# Allegro board P3.brd
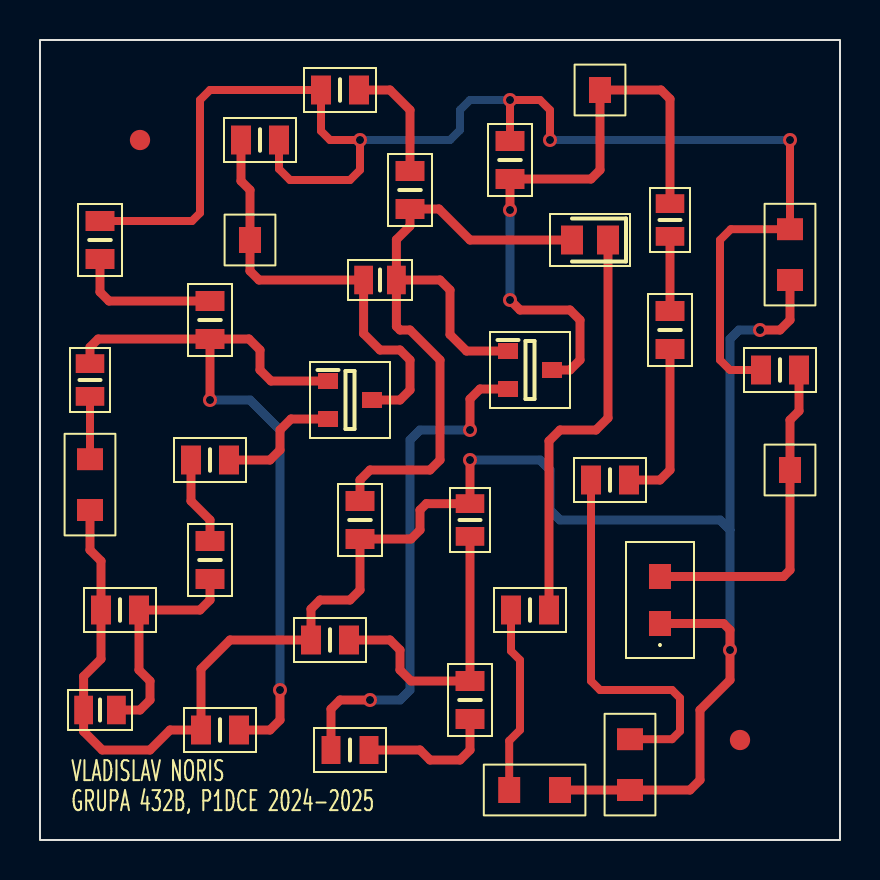
[diagram p0: board, top side]
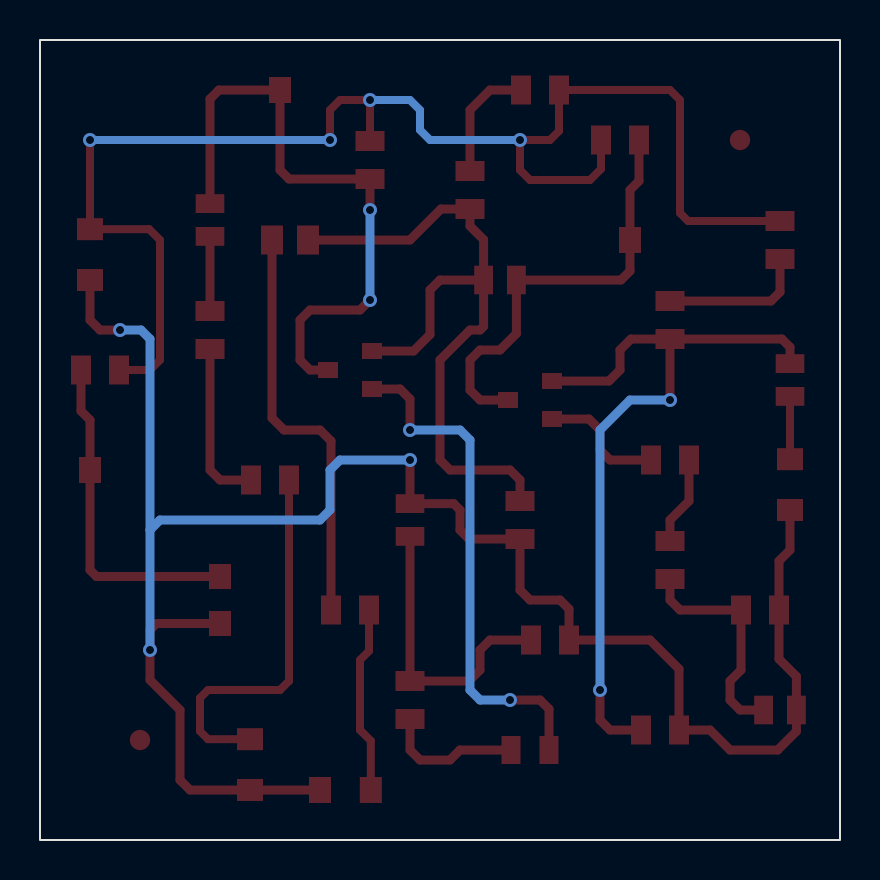
[diagram p1: board, bottom side, seen from below]

Outline 40 x 40 mm; copper layers: TOP, BOTTOM. Coordinates in mm from the lower left corner of the outline.
Outline path: rectangle 0,0 40,40

## Design rules (mm)
nets with their own width: min track width 0.4; nets VCONTROL VDC VIN VOUT
nets with their own width: min track width 0.45; nets GND N35907 N35965 N35977 N36069 N36081 N36093 N36259 N36289 N36347 N36449 N36455 N36461 N36561 N36701 N40456 N40780

## Placement (name value [footprint] x y rotation side)
C1  4.7u  [CAPC2012X140N]  2.5 23 270 top
C3  4.7u  [CAPC2012X140N]  17 28 0 top
C5  4.7u  [CAPC2012X140N]  31.5 31 270 top
C6  4.7u  [CAPC2012X140N]  3 6.5 0 top
C7  4.7u  [CAPC2012X140N]  21.5 16 270 top
D1  D1N4148  [DIOC2012X95N]  27.5 30 180 top
D2  SMLS14BET  [OFSMD2012B]  31 12 90 top
J1  CON2  [JUMPER2]  2.5 16.5 90 top
J2  CON1  [JUMPER1]  10.5 30 0 top
J3  CON2  [JUMPER2]  26 2.5 180 top
J4  CON1  [JUMPER1]  28 37.5 0 top
J5  CON2  [JUMPER2]  29.5 2.5 90 top
J6  CON1  [JUMPER1]  37.5 18.5 0 top
J7  CON2  [JUMPER2]  37.5 28 90 top
NOREF  -  []  0 40 0 top
NOREF#2  -  [unnamed#2]  35 5 0 top
NOREF#3  -  [unnamed#2]  5 35 0 top
NOREF#4  -  []  40 0 90 top
Q1  BC846B  [SOT95P230X110-3N]  15.5 22 0 top
Q2  BC846B  [SOT95P230X110-3N]  24.5 23.5 0 top
R1  10k  [RESC2013X65N]  3 30 90 top
R2  47k  [RESC2013X65N]  8.5 26 90 top
R3  6.8k  [RESC2013X65N]  9 5.5 0 top
R4  2k  [RESC2013X65N]  11 35 0 top
R5  22  [RESC2013X65N]  8.5 19 0 top
R6  100  [RESC2013X65N]  8.5 14 90 top
R7  150  [RESC2013X65N]  4 11.5 0 top
R8  15k  [RESC2013X65N]  15 37.5 180 top
R9  15k  [RESC2013X65N]  18.5 32.5 90 top
R10  6.8k  [RESC2013X65N]  16 16 90 top
R11  150  [RESC2013X65N]  24.5 11.5 0 top
R12  2k  [RESC2013X65N]  23.5 34 90 top
R13  51  [RESC2012X60N]  15.5 4.5 180 top
R14  220  [RESC2013X65N]  21.5 7 270 top
R15  150  [RESC2013X65N]  14.5 10 0 top
R16  22  [RESC2013X65N]  31.5 25.5 90 top
R17  680  [RESC2013X65N]  28.5 18 0 top
R18  470  [RESC2013X65N]  37 23.5 180 top

## Library data of the parts
C1 C3 C5-C7 = C
D1 = 1N4148_2
D2 = SMLS14BET_2
J1 J3 J5 J7 = CON2: User Part Number: ***
J2 J4 J6 = CON1: User Part Number: ***
Q1 = BC846B_0
Q2 = BC846B_1
R1-R18 = R

## Footprints (pads in the part's own frame, mm; a bottom-side part is the same pattern mirrored in y, then rotated)
CAPC2012X140N
  rect 0.94x1.43 smd: 1(-0.82,0) 2(0.82,0)
DIOC2012X95N
  rect 1.1x1.45 smd: 1(-0.9,0) 2(0.9,0)
JUMPER1
  rect 1.1x1.3 smd: 1(0,0)
JUMPER2
  rect 1.1x1.3 smd: 1(0,0) 2(2.54,0)
OFSMD2012B
  rect 1.25x1.1 smd: 1(-1.175,0) 2(1.175,0)
RESC2012X60N
  rect 0.95x1.4 smd: 1(-0.95,0) 2(0.95,0)
RESC2013X65N
  rect 1x1.45 smd: 1(-0.95,0) 2(0.95,0)
SOT95P230X110-3N
  rect 1x0.8 smd: 1(-1.1,0.95) 2(-1.1,-0.95) 3(1.1,0)
unnamed#2
  round 1.016 smd: (0,0)

## Nets
GND: C6.1 C7.1 D2.1(C) J1.1 J3.1 J5.1 J7.1 R3.1 R7.1 R10.1 R15.1
VIN: C1.2 J1.2
VCONTROL: J3.2 R11.1
VDC: J7.2 R1.2 R4.2 R8.2 R12.2 R18.2
VOUT: J5.2 R17.1
N35907: R8.1 R9.2
N35965: C5.1 J4.1 Q2.3 R12.1
N35977: C3.1 J2.1 Q1.3 R4.1
N36069: C5.2 R16.2
N36081: D2.2 J6.1 R18.1
N36093: C3.2 D1.2 Q2.1 R9.1 R10.2
N36259: C1.1 Q1.1 R2.1 R3.2
N36289: Q2.2(E) R13.2
N36347: Q1.2(E) R5.2
N36449: R16.1 R17.2
N36455: R13.1 R14.2
N36461: D1.1(C) R11.2
N36561: C7.2 R14.1 R15.2
N36701: C6.2 R6.1 R7.2
N40456: R1.1 R2.2
N40780: R5.1 R6.2

## Via types
v1: diameter 0.7, hole 0.4, TOP to BOTTOM, 13 vias

## Routing (per net, layer and track width the routed paths; a pad name or vN(x,y) marks a point on that pad's centre or on a via; arc(x,y) is an arc through that point)
GND: length 98.9
  TOP w0.45: v1(21.5,19) C7.1 19.32,16.82 19,16.5 19,15.5 18.55,15.05 R10.1 16,12.5 15.5,12 14,12 13.55,11.55 R15.1 9.5,10 8.05,8.55 R3.1 6.5,5.5 5.5,4.5 3.11,4.5 2.18,5.43 C6.1 2.18,8.18 3.05,9.05 R7.1 3.05,13.95 2.5,14.5 J1.1 ; v1(36,25.5) 37,25.5 37.5,26 J7.1 ; J3.1 J5.1 32.5,2.5 33,3 33,6.5 34.5,8 v1(34.5,9.5) 34.5,10.5 34.17,10.82 D2.1
  BOTTOM w0.45: 34.5,15.5 34.5,25.05 34.95,25.5 v1(36,25.5) ; 34.5,15.5 34,16 26,16 25.5,16.5 25.5,18.5 25,19 v1(21.5,19) ; 34.5,15.5 v1(34.5,9.5)
VIN: length 3.1
  TOP w0.4: J1.2 C1.2
VCONTROL: length 9.4
  TOP w0.4: R11.1 23.55,9.45 24,9 24,5.5 23.46,4.96 J3.2
VDC: length 71.8
  TOP w0.4: R4.2 11.95,33.55 12.5,33 15.5,33 16,33.5 v1(16,35) 14.5,35 14.05,35.45 R8.2 8.5,37.5 8,37 8,31.35 7.6,30.95 R1.2 ; R12.2 v1(23.5,37) 25,37 25.5,36.5 v1(25.5,35) ; R18.2 34.5,23.5 34,24 34,30 34.54,30.54 J7.2 v1(37.5,35)
  BOTTOM w0.4: v1(16,35) 20.5,35 21,35.5 21,36.5 21.5,37 v1(23.5,37) ; v1(37.5,35) v1(25.5,35)
VOUT: length 19.2
  TOP w0.4: R17.1 27.55,7.95 28,7.5 31.6,7.5 32,7.1 32,5.44 31.6,5.04 J5.2
N35907: length 6
  TOP w0.45: R8.1 17.5,37.5 18.5,36.5 R9.2
N35965: length 31.2
  TOP w0.45: Q2.3 26.5,23.5 27,24 27,26 26.5,26.5 24,26.5 v1(23.5,27) ; v1(23.5,31.5) R12.1 27.55,33.05 28,33.5 J4.1 31.05,37.5 31.5,37.05 C5.1
  BOTTOM w0.45: v1(23.5,27) v1(23.5,31.5)
N35977: length 21.8
  TOP w0.45: Q1.3 18,22 18.5,22.5 18.5,24 18,24.5 17,24.5 16.18,25.32 C3.1 10.95,28 10.5,28.45 J2.1 10.5,32.5 10.05,32.95 R4.1
N36069: length 3.7
  TOP w0.45: R16.2 C5.2
N36081: length 16.8
  TOP w0.45: D2.2 37.17,13.18 37.5,13.5 J6.1 37.5,21 37.95,21.45 R18.1
N36093: length 36.6
  TOP w0.45: Q2.1 21.32,24.45 20.5,25.27 20.5,27.5 20,28 C3.2 ; R10.2 16,18 16.5,18.5 19.5,18.5 20,19 20,24 18.5,25.5 18,25.5 17.82,25.68 C3.2 ; C3.2 17.82,30.02 18.5,30.7 R9.1 19.95,31.55 21.5,30 D1.2
N36259: length 38.3
  TOP w0.45: R2.1 10.45,25.05 11,24.5 11,23.5 11.55,22.95 Q1.1 ; R2.1 2.91,25.05 2.5,24.64 C1.1 ; R2.1 v1(8.5,22) ; R3.2 11.5,5.5 12,6 v1(12,7.5)
  BOTTOM w0.45: v1(8.5,22) 10.5,22 12,20.5 v1(12,7.5)
N36289: length 25.8
  TOP w0.45: Q2.2 22,22.55 21.5,22.05 v1(21.5,20.5) ; R13.2 14.55,6.55 15,7 v1(16.5,7)
  BOTTOM w0.45: v1(21.5,20.5) 19,20.5 18.5,20 18.5,7.5 18,7 v1(16.5,7)
N36347: length 6.4
  TOP w0.45: Q1.2 12.55,21.05 12,20.5 12,19.5 11.5,19 R5.2
N36449: length 8.3
  TOP w0.45: R17.2 31,18 31.5,18.5 R16.1
N36455: length 7
  TOP w0.45: R13.1 19,4.5 19.5,4 21,4 21.5,4.5 R14.2
N36461: length 20.8
  TOP w0.45: R11.2 25.45,19.95 26,20.5 27.8,20.5 28.4,21.1 D1.1
N36561: length 14.7
  TOP w0.45: R15.2 17.5,10 18,9.5 18,8.5 18.55,7.95 R14.1 C7.2
N36701: length 11.4
  TOP w0.45: R6.1 8.5,12 8,11.5 R7.2 4.95,8.5 5.5,7.95 5.5,7 5,6.5 C6.2
N40456: length 7.4
  TOP w0.45: 3,29.1 R1.1 3,27.4 3.45,26.95 R2.2
N40780: length 4.4
  TOP w0.45: R5.1 7.55,16.95 8.5,16 R6.2

## Text on the board
Ref Des/Silkscreen Top: VLADISLAV NORIS | GRUPA 432B, P1DCE 2024-2025
XSECTION_CHART: *  SURFACE - AIR 0 MM | L1 TOP CONDUCTOR - COPPER 0.018 MM | *  DIELECTRIC - FR-4 1.564 MM | L2 BOTTOM CONDUCTOR - COPPER 0.018 MM | DESIGN CROSS SECTION CHART | ___________________________ | TOTAL THICKNESS 1.6 MM | 1-2
DIMENSION: FIGURE | FINISHED_SIZE | 0.4 | DRILL CHART: TOP to BOTTOM | ALL UNITS ARE IN MILLIMETERS | PLATED | QTY | 13
